# Altium PCB XDM3.3_PCB.PcbDoc
Units mm, origin at the board's own origin, x right, y up, seen from the top; angles counter-clockwise.
Board outline 151.26 x 111.81 mm, 2 copper layers (Top Layer, Bottom Layer); 89 components, 91 nets, 394 pads, 121 vias.
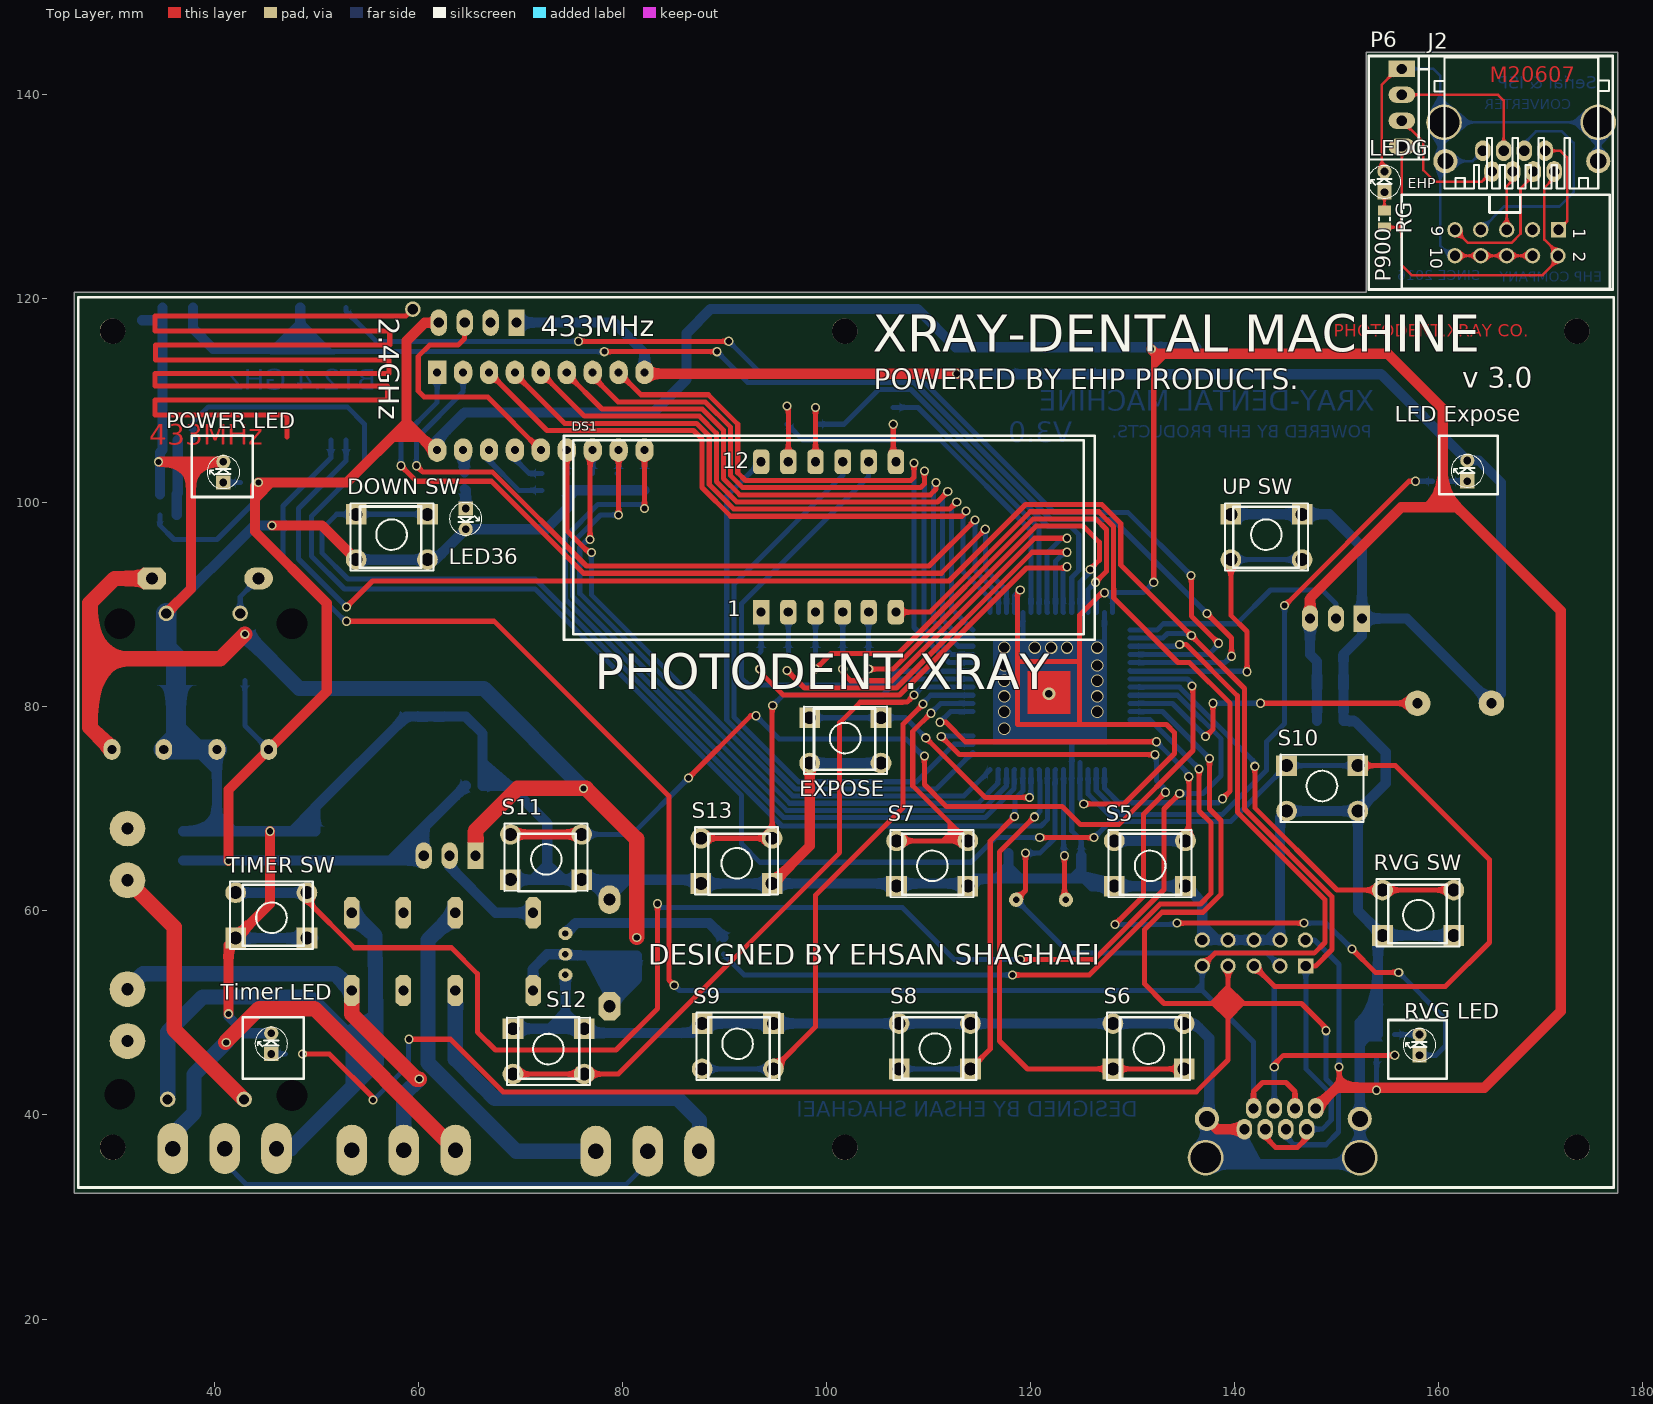
[diagram p0: Top Layer view]
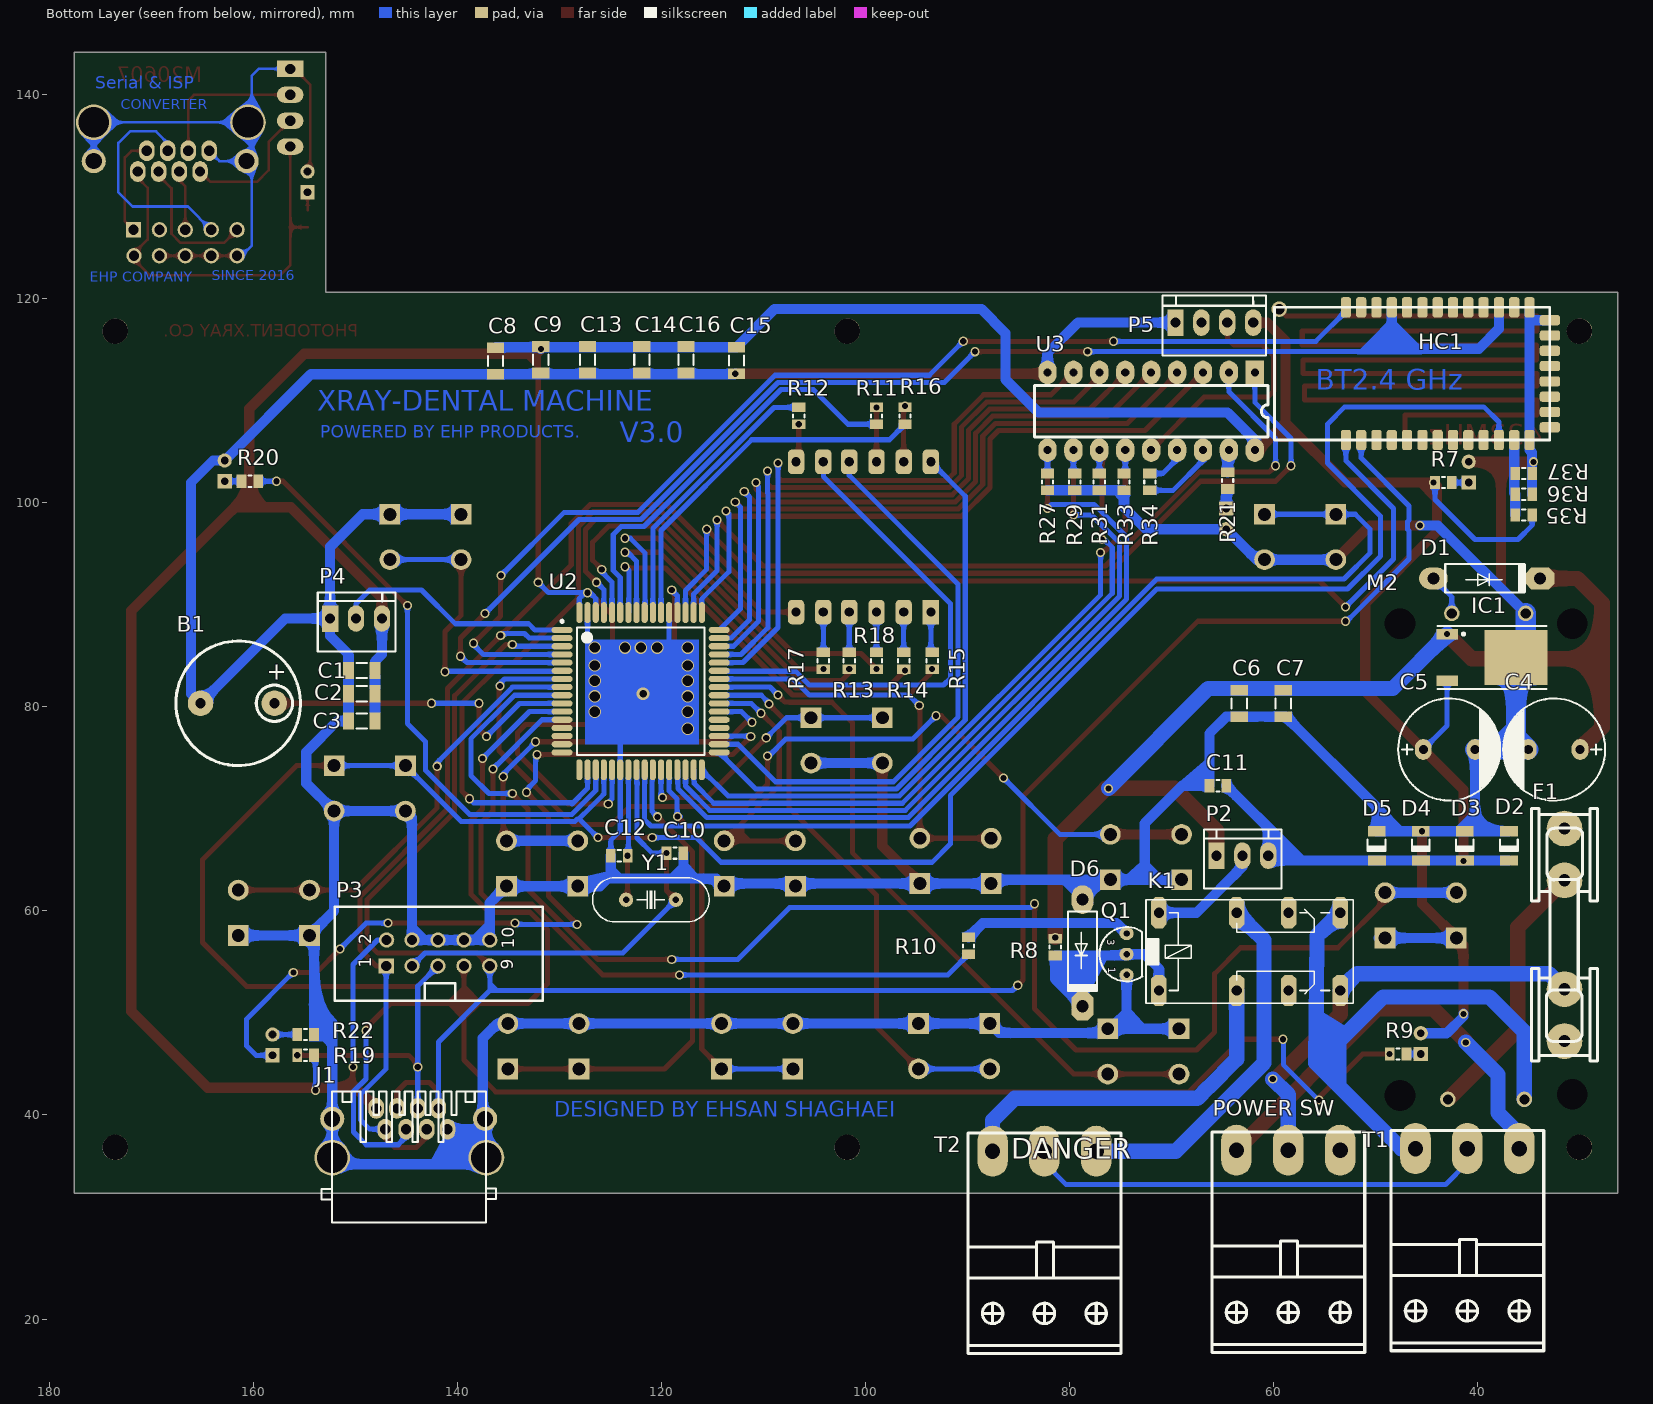
[diagram p1: Bottom Layer view, seen from below]

## Layer stack, top to bottom
Top Solder: solder mask 0.0102, Solder Resist, Dk 3.5
Top Layer: signal copper 0.0356
Dielectric1: dielectric 0.32, FR-4, Dk 4.8
Bottom Layer: signal copper 0.0356
Bottom Solder: solder mask 0.0102, Solder Resist, Dk 3.5

## Board outline
26.289,32.334 177.546,32.334 177.546,144.145 152.908,144.145 152.908,120.65 26.289,120.65

## Design rules (kind name [scope] priority, off if disabled: settings)
Clearance Clearance_2 [InPolygon] p1: gap=0.8
Clearance Clearance_1 [(OnLayer('Keep-Out Layer'))] p2: gap=0
Clearance [All] p3: gap=0.2
ComponentClearance [All] p1 off: gap=0.254 collisioncheckmode=3 verticalgap=0.254 showdistances=FALSE
FabricationTestpoint [(IsPad And (OnTopLayer Or OnBottomLayer))] p1: side=3 testpointundercomponent=TRUE minsize=1.016 maxsize=2.54 preferedsize=1.524 minholesize=0 maxholesize=1.016 preferedholesize=0.813 testpointgrid=0.025 allowsidetop=TRUE allowsidebottom=TRUE usegrid=TRUE gridtolerance=0
HoleSize [All] p1: absolutevalues=TRUE maxlimit=5 minlimit=0.025 maxpercent=80.000 minpercent=20.000
PolygonConnect [All] p1: connectstyle=Relief reliefconductorwidth=0.254 reliefentries=4 polygonreliefangle="90 Angle" airgapwidth=0.254
RoutingVias [All] p1: holewidth=0.6 width=0.9 viastyle="Through Hole" minholewidth=0.5 minwidth=0.7 maxholewidth=1.5 maxwidth=1.8
SolderMaskExpansion [All] p1: expansion=0.102
Width [All] p1: maxlimit=5 minlimit=0.1 preferedwidth=0.3
27 further rules are at their usual default settings.

## Components (designator, comment, footprint, x,y, rotation, side; value= is the part's Value field where it differs from the comment)
B1 "Buzzer" Buzzer 161.798,80.645 r180 bottom locked
C1 "10u" SMD_CAP_1206 148.082,83.566 r0 bottom locked
C2 "10u" SMD_CAP_1206 148.082,81.28 r0 bottom locked
C3 "100nF" SMD_CAP_1206 148.082,78.613 r0 bottom locked
C4 "1uF" "cap 04" 32.512,75.819 r180 bottom locked
C5 "1uF" "cap 04" 42.799,75.819 r0 bottom locked
C6 "10u" SMD_CAP_1206 63.373,81.636 r270 bottom locked
C7 "100nF" SMD_CAP_1206 59.055,81.636 r270 bottom locked
C8 "10u" SMD_CAP_1206 136.271,115.189 r270 bottom locked
C9 "100nF" SMD_CAP_1206 131.826,115.316 r270 bottom locked
C10 "18pF" SMD_CAP_0805 117.856,65.659 r0 bottom locked
C11 "100nF" SMD_CAP_0805 66.294,72.263 r180 bottom locked
C12 "18pF" SMD_CAP_0805 124.968,65.405 r180 bottom locked
C13 "10uF" SMD_CAP_1206 127.254,115.316 r270 bottom locked
C14 "10u" SMD_CAP_1206 121.92,115.316 r270 bottom locked
C15 "10u" SMD_CAP_1206 112.649,115.245 r270 bottom locked
C16 "100nF" SMD_CAP_1206 117.602,115.316 r270 bottom locked
D1 "1N4007" My_DO-41 33.665,92.837 r0 bottom locked
D2 "Diode Zener SMD" DIOMELF3615N 36.957,66.421 r90 bottom locked
D3 "Diode Zener SMD" DIOMELF3615N 41.275,66.421 r90 bottom locked
D4 "Diode Zener SMD" DIOMELF3615N 45.593,66.421 r90 bottom locked
D5 "Diode Zener SMD" DIOMELF3615N 49.911,66.421 r90 bottom locked
D6 "1N4007" My_DO-41 78.486,50.419 r90 bottom locked
"DOWN SW" "Switch PB" "Switch - Push to On" 57.404,96.647 r0 top locked
DS1 "7Segment-4Digit-CA" 7segCA 75.184,87.122 r0 top locked
EXPOSE "Switch PB" "Switch - Push to On" 101.854,76.708 r0 top locked
F1 "FUSE" FUSE_1 31.496,52.324 r90 bottom locked
HC1 "HC-05 Bluetooth" HC-05 42.926,112.649 r90 bottom locked
IC1 "L78M05" TO-252 39.624,84.836 r270 bottom locked
J1 "RJ45" My_RJ45 144.78,32.258 r180 bottom locked
J2 "RJ45" My_RJ45 168.148,140.843 r180 top locked
K1 "Relay-DPDT" My_REL_cochick 67.437,56.007 r180 bottom locked
LED36 "Red" LED-3mm 64.643,98.425 r270 top locked
"LED Expose" "Red" LED-3mm 162.814,103.124 r90 top locked
LEDG "Red" LED-3mm 154.686,131.445 r90 top locked
M2 "220-12 Medule" "AC-DC 220-12" 27.305,39.497 r90 bottom locked
P2 "LHWR" "Polarized Header 3" 63.119,65.532 r180 bottom locked
P3 "BoxHeader 2x5" "Box Header 2x5" 139.319,54.61 r90 bottom locked
P4 "LHWR" "Polarized Header 3" 149.987,88.773 r180 bottom locked
P5 "LHWR" "Polarized Header 4" 65.786,117.856 r180 bottom locked
P6 "LHWR" "Polarized Header 4" 156.591,138.684 r270 top locked
P900 "BoxHeader 2x5" "Box Header 2x5" 164.084,126.746 r270 top locked
"POWER LED" "Red" LED-3mm 40.894,102.997 r90 top locked
"POWER SW" "PHONIX3" PHONIX3 53.492,36.551 r0 bottom
Q1 "C945" C945 74.422,55.753 r270 bottom locked
R7 "330" "RES 0805 (2012X06L)" 44.196,101.981 r180 bottom locked
R8 "1K" "RES 0805 (2012X06L)" 81.407,55.626 r90 bottom locked
R9 "330" "RES 0805 (2012X06L)" 48.641,45.974 r180 bottom locked
R10 "330" "RES 0805 (2012X06L)" 89.916,55.753 r90 bottom locked
R11 "330" "RES 0805 (2012X06L)" 96.139,107.696 r90 bottom locked
R12 "330" "RES 0805 (2012X06L)" 106.553,109.346 r270 bottom locked
R13 "330" "RES 0805 (2012X06L)" 101.6,83.693 r90 bottom locked
R14 "330" "RES 0805 (2012X06L)" 96.266,83.693 r90 bottom locked
R15 "330" "RES 0805 (2012X06L)" 93.472,83.693 r90 bottom locked
R16 "330" "RES 0805 (2012X06L)" 98.933,107.696 r90 bottom locked
R17 "330" "RES 0805 (2012X06L)" 104.14,83.693 r90 bottom locked
R18 "330" "RES 0805 (2012X06L)" 98.933,83.693 r90 bottom locked
R19 "10K" "RES 0805 (2012X06L)" 154.052,45.847 r0 bottom locked
R20 "330" "RES 0805 (2012X06L)" 159.512,102.108 r0 bottom locked
R21 "330" "RES 0805 (2012X06L)" 64.516,102.997 r270 bottom locked
R22 "330" "RES 0805 (2012X06L)" 154.051,47.879 r0 bottom locked
R27 "1K" "RES 0805 (2012X06L)" 82.169,102.87 r270 bottom locked
R29 "1K" "RES 0805 (2012X06L)" 79.502,102.87 r270 bottom locked
R31 "1K" "RES 0805 (2012X06L)" 77.089,102.87 r270 bottom locked
R33 "1K" "RES 0805 (2012X06L)" 74.676,102.87 r270 bottom locked
R34 "820k" "RES 0805 (2012X06L)" 72.136,101.219 r90 bottom locked
R35 "51k" "RES 0805 (2012X06L)" 36.322,98.806 r180 bottom locked
R36 "100k" "RES 0805 (2012X06L)" 34.671,100.838 r0 bottom locked
R37 "100k" "RES 0805 (2012X06L)" 34.671,102.87 r0 bottom locked
RG "330" "RES 0805 (2012X06L)" 154.686,127 r90 top locked
"RVG LED" "Red" LED-3mm 158.115,46.863 r90 top locked
"RVG SW" "Switch PB" "Switch - Push to On" 157.988,59.817 r180 top locked
S5 "Switch PB" "Switch - Push to On" 131.699,64.643 r180 top locked
S6 "Switch PB" "Switch - Push to On" 131.572,46.736 r180 top locked
S7 "Switch PB" "Switch - Push to On" 110.363,64.643 r180 top locked
S8 "Switch PB" "Switch - Push to On" 110.617,46.736 r180 top locked
S9 "Switch PB" "Switch - Push to On" 91.313,46.736 r0 top locked
S10 "Switch PB" "Switch - Push to On" 148.59,72.009 r0 top locked
S11 "Switch PB" "Switch - Push to On" 72.517,65.278 r180 top locked
S12 "Switch PB" "Switch - Push to On" 72.771,46.228 r0 top locked
S13 "Switch PB" "Switch - Push to On" 91.186,64.897 r180 top locked
T1 "PHONIX3" PHONIX3 35.941,36.703 r0 bottom locked
T2 "PHONIX3" PHONIX3 77.394,36.449 r0 bottom
"Timer LED" "Red" LED-3mm 45.593,46.99 r90 top locked (schematic designator Timer)
"TIMER SW" "Switch PB" "Switch - Push to On" 45.593,59.563 r180 top locked
U2 "ATmega64A-AU" 64A_M 122.047,81.534 r180 bottom locked
U3 "PT2272" DIP18 61.849,112.776 r270 bottom locked
"UP SW" "Switch PB" "Switch - Push to On" 143.129,96.647 r0 top locked
Y1 "16MHz" "XTAL Small" 121.031,61.087 r0 bottom locked

## Footprints (in the part's own frame and the unit in brackets; to place one, negate y for a bottom-side part, rotate by r counter-clockwise, add the part's x,y. Pads: shape width x height; smd on the part's side, far side on the other; paste and mask are expansions set on the pad)
7segCA [mm] "7seg-CA; 12 Leads"
  rect 1.6x2.4 hole 0.9: 1(18.415,2.159)
  rrect50% 1.6x2.4 hole 0.9: 2(21.082,2.159) 3(23.749,2.159) 4(26.416,2.159) 5(28.956,2.159) 6(31.623,2.159) 7(31.623,16.891) 8(28.956,16.891) 9(26.416,16.891) 10(23.749,16.891) 11(21.082,16.891) 12(18.415,16.891)
  silkscreen extent 0,0 50.04,19
64A_M [mm] "Thin QFP, 64-Leads, Body 14x14mm, Pitch 0.8mm, IPC Low Density"
  oval 2.05x0.6 smd: 1(-7.7,6) 2(-7.7,5.2) 3(-7.7,4.4) 4(-7.7,3.6) 5(-7.7,2.8) 6(-7.7,2) 7(-7.7,1.2) 8(-7.7,0.4) 9(-7.7,-0.4) 10(-7.7,-1.2) 11(-7.7,-2) 12(-7.7,-2.8) 13(-7.7,-3.6) 14(-7.7,-4.4) 15(-7.7,-5.2) 16(-7.7,-6) 33(7.7,-6) 34(7.7,-5.2) 35(7.7,-4.4) 36(7.7,-3.6) 37(7.7,-2.8) 38(7.7,-2) 39(7.7,-1.2) 40(7.7,-0.4) 41(7.7,0.4) 42(7.7,1.2) 43(7.7,2) 44(7.7,2.8) 45(7.7,3.6) 46(7.7,4.4) 47(7.7,5.2) 48(7.7,6)
  oval 0.6x2.05 smd: 17(-6,-7.7) 18(-5.2,-7.7) 19(-4.4,-7.7) 20(-3.6,-7.7) 21(-2.8,-7.7) 22(-2,-7.7) 23(-1.2,-7.7) 24(-0.4,-7.7) 25(0.4,-7.7) 26(1.2,-7.7) 27(2,-7.7) 28(2.8,-7.7) 29(3.6,-7.7) 30(4.4,-7.7) 31(5.2,-7.7) 32(6,-7.7) 49(6,7.7) 50(5.2,7.7) 51(4.4,7.7) 52(3.6,7.7) 53(2.8,7.7) 54(2,7.7) 55(1.2,7.7) 56(0.4,7.7) 57(-0.4,7.7) 58(-1.2,7.7) 59(-2,7.7) 60(-2.8,7.7) 61(-3.6,7.7) 62(-4.4,7.7) 63(-5.2,7.7) 64(-6,7.7)
  silkscreen extent -7.83,-6.25 6.25,6.97, body extent -7,-7 7,7, height 1.2
"AC-DC 220-12" [mil]
  round 60 hole 39.37: 0(1955,600) 1(1955,315) 2(80,615) 3(80,320)
  round 60 hole 118.11: 4(1915,135) 5(1915,800) 6(95,800) 7(100,135)
  body extent 6,-5 2014,940, height 118
"Box Header 2x5" [mm]
  rect 1.5x1.5 hole 1: 1(-0.006,7.666)
  round 1.5 hole 1: 2(2.54,7.62) 3(-0.006,5.126) 4(2.534,5.126) 5(-0.006,2.586) 6(2.534,2.586) 7(-0.006,0.046) 8(2.534,0.046) 9(-0.006,-2.494) 10(2.534,-2.494)
  silkscreen extent -3.42,-7.7 5.8,12.7, body extent -3.4,-7.7 5.7,12.66, height 9.43
Buzzer [mm] "Magnetic Transducer"
  round 2.5 hole 1: 1(3.859,-0.297) 2(-3.38,-0.297)
  silkscreen extent -5.8,-6.4 6.4,5.8, body extent -5.67,-6.39 6.17,5.45, height 6.98
C945 [mil] "NPN Transistor"
  oval 50x55 hole 25: 1(80,0) 2(0,0) 3(-80,0)
  silkscreen extent -105,-105 105,61, body extent -94,-96 95,58, height 315
"cap 04" [mil]
  oval 65x80 hole 35: 1(100,0) 2(-100,0)
  silkscreen extent -197,-197 197,197, body extent -198,-197 198,199, height 513
DIOMELF3615N [mm] "MELF Diode, 2-Leads, Body 3.6x1.5mm, IPC Medium Density"
  rect 1x1.75 smd: 1(-1.495,-0.03) 2(1.38,-0.005)
  silkscreen extent -0.55,-0.88 0.55,0.88, body extent -1.61,-0.83 1.54,0.67, height 1.45
DIP18 [mm]
  rect 2.3x1.8 hole 0.8: 1(0,0)
  oval 2.3x1.8 hole 0.8: 2(0,-2.54) 3(0,-5.08) 4(0,-7.62) 5(0,-10.16) 6(0,-12.7) 7(0,-15.24) 8(0,-17.78) 9(0,-20.32) 10(7.62,-20.32) 11(7.62,-17.78) 12(7.62,-15.24) 13(7.62,-12.7) 14(7.62,-10.16) 15(7.62,-7.62) 16(7.62,-5.08) 17(7.62,-2.54) 18(7.62,0)
  silkscreen extent 1.27,-21.59 6.35,1.27
FUSE_1 [mm]
  round 3.5 hole 1.2: 1(0,0) 2(10.668,0) ""(-5.08,0) ""(15.748,0)
  silkscreen extent -7.04,-3.25 17.7,3.25
HC-05 [mm]
  rrect50% 2x1 smd: 1(-6.5,10) 2(-6.5,8.5) 3(-6.5,7) 4(-6.5,5.5) 5(-6.5,4) 6(-6.5,2.5) 7(-6.5,1) 8(-6.5,-0.5) 9(-6.5,-2) 10(-6.5,-3.5) 11(-6.5,-5) 12(-6.5,-6.5) 13(-6.5,-8) 22(6.5,-8) 23(6.5,-6.5) 24(6.5,-5) 25(6.5,-3.5) 26(6.5,-2) 27(6.5,-0.5) 28(6.5,1) 29(6.5,2.5) 30(6.5,4) 31(6.5,5.5) 32(6.5,7) 33(6.5,8.5) 34(6.5,10)
  rrect50% 1x2 smd: 14(-5.254,-10) 15(-3.754,-10) 16(-2.254,-10) 17(-0.754,-10) 18(0.746,-10) 19(2.246,-10) 20(3.746,-10) 21(5.246,-10)
  silkscreen extent -6.5,-10 6.5,17, body extent -6.5,-9.77 6.5,17.13, height 2.5
LED-3mm [mil]
  rect 55x55 hole 30: 1(-40,0)
  round 55 hole 30: 2(40,0)
  silkscreen extent -63,-63 63,63, body extent -69,-69 69,69, height 154
My_DO-41 [mil]
  oval 110x85 hole 47.24: A(420.71,10)
  oct 110x85 hole 47.24: K(8.9,10)
  silkscreen extent 64,-45 375,65
My_REL_cochick [mil]
  oct 60x120 hole 40: 1(-150,-150) 2(-150,150) O1(350,-150) O2(350,150) P1(150,-150) P2(150,150) S1(550,-150) S2(550,150)
  silkscreen extent -200,-200 600,200
My_RJ45 [mil]
  oval 60x80 hole 40: 1(150,250) 2(115,330) 3(70,250) 4(35,330) 5(-10,250) 6(-45,330) 7(-90,250) 8(-125,330)
  round 137.8 hole 118.11 unplated: shild(-295,140) shild(300,140)
  round 92.99 hole 62.01: shild(-295,290) shild(295,290)
  silkscreen extent -336,-110 336,395
PHONIX3 [mm]
  oval 3x5 hole 1.5: 1(0,0) 2(5.08,0) 3(10.16,0)
  silkscreen extent -2.41,-1.78 12.57,19.81
"Polarized Header 3" [mm]
  rect 1.6x2.6 hole 1: 1(-2.49,-0.12)
  oval 1.6x2.6 hole 1: 2(0.05,-0.12) 3(2.59,-0.12)
  silkscreen extent -3.7,-3.35 3.9,2.42, body extent -3.72,-3.35 3.9,2.45, height 10.75
"Polarized Header 4" [mm]
  rect 1.6x2.6 hole 1: 1(-3.84,-0.2)
  oval 1.6x2.6 hole 1: 2(-1.3,-0.2) 3(1.24,-0.2) 4(3.78,-0.2)
  silkscreen extent -5.1,-3.42 5.05,2.45, body extent -5.06,-3.43 5.1,2.37, height 10.75
"RES 0805 (2012X06L)" [mm] "Chip Resistor, 2-Leads, Body 2.0x1.3mm, IPC High Density _ (0.100 W)"
  rect 0.95x1.3 smd: 1(0,0) 2(1.65,0)
  silkscreen extent 0.67,-0.55 0.98,0.55, body extent -0.19,-0.63 1.84,0.64, height 0.6
SMD_CAP_0805 [mm]
  rect 0.95x1.3 smd: 1(0,0) 2(1.65,0)
  silkscreen extent 0.67,-0.55 0.98,0.55, body extent -0.19,-0.64 1.84,0.63, height 0.65
SMD_CAP_1206 [mm]
  rect 1.05x1.7 smd: 1(0,0) 2(2.596,0)
  silkscreen extent 0.8,-0.75 1.8,0.75, body extent -0.22,-0.77 2.82,0.75, height 0.75
"Switch - Push to On" [mil]
  rect 80x80 hole 50: 1(-137.5,87.5) 1(137.5,87.5)
  round 80 hole 50: 2(-137.5,-87.5) 2(137.5,-87.5)
  silkscreen extent -160,-130 160,130, body extent -155,-121 157,123, height 205
TO-252 [mm] "D-PAK/TO-252-AA; 3 Leads (1 Cropped); Body 10.1 (inc. leads) x 6.6 mm (LxW max)"
  rect 1x2.1 smd: 1(-2.285,-3.375) 3(2.285,-3.375)
  rect 5.4x6.2 smd: 4(0,3.375)
  silkscreen extent -3.08,-4.33 3.08,6.37, body extent -3.27,-4.11 3.27,5.83, height 2.39
"XTAL Small" [mil]
  round 55 hole 25: 1(-96.06,0) 2(96.06,0)
  silkscreen extent -225,-85 225,85, body extent -226,-89 226,89, height 140

## Part data
C1 C2 C3 C6 C7 C8 C9 C10 C11 C12 C13 C14 C15 C16: library part Cap-Bipolar, "Bipolar Capacitor"
C4 C5: library part Cap-Polar, "Polar Capacitor"
D1 D6: "1 Amp Diode"
"DOWN SW" EXPOSE "RVG SW" S5 S6 S7 S8 S9 S10 S11 S12 S13 "TIMER SW" "UP SW": "Push Button Switch"
DS1: library part 7Seg-4Digit-CA, "7-Segment Display: CA"
IC1: "Precision 500mA Regulator"
J1 J2: "Right Angle, Standard Profile, RJ45-Keyed, Flange Mount PCB Jack"
K1: "Dual-Pole Dual-Throw Relay"
LED36 "LED Expose" LEDG "POWER LED" "RVG LED" "Timer LED": library part LED, "LED"
P2 P4: library part "3pin LHWR"
P5 P6: library part "4pin LHWR"
Q1: "NPN Transistor"
R7 R8 R9 R10 R11 R12 R13 R14 R15 R16 R17 R18 R19 R20 R21 R22 R27 R29 R31 R33 R34 R35 R36 R37 RG: library part Resistor, "Resistor"
U2: "8-bit AVR Microcontroller, 64KB Flash, 2KB EEPROM, 4KB SRAM, 64-pin TQFP, Industrial Grade (-40°C to 85°C)"
Y1: library part XTAL, "XTAL Crystal"

## Free pads (board coordinates)
  round 2.5 hole 2.5: 1(30.032,36.818) 1(30.032,116.818) 1(101.782,36.818) 1(101.782,116.818) 1(173.532,36.818) 1(173.532,116.818)
  round 1.524 hole 1: ANTENNA(59.461,118.974)

## Via types
v1: diameter 0.9, hole 0.6, Top Layer to Bottom Layer, 106 vias
v2: diameter 1.2, hole 1, Top Layer to Bottom Layer, 14 vias
v3: diameter 1.27, hole 0.711, Top Layer to Bottom Layer, 1 vias

## Nets (pads, with @x,y where several pads share a name; then routed paths per layer and width w, separated by ;. In a path a pad name is that pad's centre, name@x,y a point inside that pad or via, vN(x,y) a via of type N, cw(c..) or ccw(c..) an arc to the next point about the centre after c; other vN are vias at no path point)
+12: C4.1 C6.1 C7.1 D1.K IC1.1 P2.1 R8.2 | length 114
  Top Layer w1.5: C4.1 27.813,77.978 27.813,84.709 ; D1.K 30.226,92.583 27.813,90.17 27.813,84.709 ; v1(42.999,87.121) 40.587,84.709 27.813,84.709 ; P2.1 65.609,67.895 69.723,72.009 v1(76.2,72.009) 76.454,72.009 81.407,67.056 v1(81.407,57.404)
  Bottom Layer w0.5: C7.1 C6.1
  Bottom Layer w1.5: v1(42.999,87.121) 48.332,81.788 66.421,81.788 v1(76.2,72.009)
A0: U2.51 U3.1 | length 83.1
  Top Layer w0.5: v1(58.293,103.632) 59.817,102.108 67.184,102.108 76.201,93.091 111.252,93.091 v1(115.57,97.409)
  Bottom Layer w0.5: v1(58.293,103.632) 58.293,106.299 61.849,109.855 U3.1 ; v1(115.57,97.409) 115.57,93.472 117.647,91.395 U2.51
A1: U2.50 U3.2 | length 81.7
  Top Layer w0.5: v1(59.817,103.632) 60.452,102.997 67.285,102.997 76.491,93.791 110.047,93.791 v1(114.554,98.298)
  Bottom Layer w0.5: v1(59.817,103.632) 59.817,106.299 64.389,110.871 U3.2 ; v1(114.554,98.298) 114.554,93.345 116.847,91.052 U2.50
A2: U2.49 U3.3 | length 66.8
  Top Layer w0.5: U3.3 72.619,107.086 86.97,107.086 87.813,106.243 87.813,101.493 90.627,98.679 113.303,98.679 113.665,99.041 v1(113.665,99.187)
  Bottom Layer w0.5: v1(113.665,99.187) 113.4,98.922 113.4,93.229 116.047,90.582 U2.49
A3: U2.48 U3.4 | length 65.6
  Top Layer w0.5: U3.4 69.469,112.649 74.332,107.786 87.26,107.786 88.513,106.533 88.513,101.783 90.917,99.379 112.079,99.379 v1(112.776,100.076)
  Bottom Layer w0.5: v1(112.776,100.076) 112.268,99.568 112.268,89.613 U2.48
A4: U2.47 U3.5 | length 64.8
  Top Layer w0.5: U3.5 76.299,108.486 87.549,108.486 89.213,106.823 89.213,102.073 91.207,100.079 110.874,100.079 v1(111.887,101.092)
  Bottom Layer w0.5: v1(111.887,101.092) 111.368,100.573 111.368,88.53 113.164,86.734 U2.47
A5: U2.46 U3.6 | length 63.5
  Top Layer w0.5: U3.6 74.549,112.649 78.012,109.186 87.839,109.186 89.913,107.113 89.913,102.363 91.497,100.779 110.177,100.779 110.744,101.346 v1(110.744,101.981)
  Bottom Layer w0.5: 110.49,100.33 110.479,100.341 ; v1(110.744,101.981) 110.744,101.865 110.479,101.6 110.479,100.341 ; U2.46 112.948,85.934 110.479,88.403 110.479,100.341
A6: U2.45 U3.7 | length 63.4
  Top Layer w0.5: U3.7 76.708,112.776 79.598,109.886 88.129,109.886 90.613,107.403 90.613,102.653 91.787,101.479 109.226,101.479 109.601,101.854 v1(109.601,103.124)
  Bottom Layer w0.5: v1(109.601,103.124) 109.601,100.968 109.579,100.946 109.579,87.753 112.198,85.134 U2.45
A7: U2.44 U3.8 | length 61
  Top Layer w0.5: U3.8 81.819,110.586 88.419,110.586 91.313,107.693 91.313,102.943 92.077,102.179 108.275,102.179 108.585,102.489 v1(108.585,103.886)
  Bottom Layer w0.5: v1(108.585,103.886) 108.574,103.875 108.574,87.768 112.008,84.334 U2.44
AS: HC1.24 HC1.31 U2.5 | length 132.2
  Top Layer w0.5: v1(78.232,114.808) v1(89.281,114.808) ; v1(137.287,89.154) 139.7,86.741 v1(139.7,84.963)
  Bottom Layer w0.5: 48.426,117.817 51.435,114.808 v1(78.232,114.808) ; v1(89.281,114.808) 92.292,111.797 108.574,111.797 122.008,98.363 128.078,98.363 v1(137.287,89.154) ; U2.5 139.071,84.334 v1(139.7,84.963)
  Bottom Layer w1: HC1.24 37.926,117.039 39.878,115.087 45.999,115.087 48.426,117.514 48.426,117.817 HC1.31
D0: R33.1 U2.32 U3.13 | length 66
  Top Layer w0.5: U3.13 74.549,97.282 76.708,95.123 v1(76.962,95.123)
  Bottom Layer w0.5: U3.13 74.549,102.997 R33.1 ; v1(76.962,95.123) 76.962,90.981 96.69,71.253 113.466,71.253 U2.32
D1: R31.1 U2.31 U3.12 | length 68.8
  Top Layer w0.5: v1(76.835,96.393) 76.835,104.648 76.708,104.775 U3.12
  Bottom Layer w0.5: v1(76.835,96.393) 76.581,96.393 75.819,95.631 75.819,91.134 96.4,70.553 114.876,70.553 116.797,72.474 116.797,73.834 U2.31 ; R31.1 U3.12
D2: R29.1 U2.30 U3.11 | length 73.4
  Top Layer w0.5: v1(79.629,98.806) U3.11
  Bottom Layer w0.5: R29.1 79.629,102.997 U3.11 ; v1(79.629,98.806) 77.851,98.806 75.119,96.074 75.119,90.844 96.11,69.853 115.269,69.853 117.647,72.231 U2.30
D3: R27.1 U2.29 U3.10 | length 79.2
  Top Layer w0.5: v1(82.169,99.441) U3.10
  Bottom Layer w0.5: v1(82.169,99.441) 81.788,99.822 77.597,99.822 74.419,96.644 74.419,90.554 95.82,69.153 115.559,69.153 118.397,71.991 118.397,73.784 U2.29 ; R27.1 U3.10
EARTH: T1.2 T2.2 | length 46
  Top Layer w1.5: T1.2@41.453,37.287 T1.2@41.707,37.287
  Bottom Layer w0.5: T1.2 41.021,35.306 43.155,33.172 80.34,33.172 82.474,35.306 T2.2
GND: "DOWN SW.2" "LED Expose.2" "POWER LED.2" "RVG SW.1" "Timer LED.2" "TIMER SW.1" "UP SW.1" B1.2 C1.2 C2.2 C3.2 C4.2 C5.2 C6.2 C7.2 C8.2 C9.2 C10.1 C11.1 C12.1 C13.2 C14.2 C15.2 C16.2 D2.2 D3.2 D4.2 D5.2 D6.A EXPOSE.2 HC1.13 HC1.21 HC1.22 IC1.4 J1.1 J1.shild LED36.2 M2.1 P3.4 P3.6 P3.8 P3.10 P4.1 P5.1 Q1.1 R22.1 R27.2 R29.2 R31.2 R33.2 R36.1 R37.1 S5.1 S6.2 S7.1 S8.2 S9.1 S10.2 S11.1 S12.1 S13.1 U2.22 U2.53 U2.63 U3.9 | length 720
  Top Layer w1: v1@34.671,104.013 37.719,104.013 ; M2.1 37.719,91.567 37.719,104.013 ; 40.894,104.013 37.719,104.013 ; v1(41.402,49.911) 41.402,56.642 42.1,57.34 45.466,60.706 v1(45.466,67.801) ; v1(45.669,97.765) 50.571,97.765 53.911,94.424 ; U3.9@82.296,112.649 v1(112.776,112.649) ; S13.1@94.678,62.674 98.361,66.358 EXPOSE.2@98.361,74.486 ; J1.shild@137.287,39.624 138.303,38.608 J1.1
  Bottom Layer w0.5: U2.53 119.247,85.35 124.047,80.55 ; C12.1 124.968,66.929 124.047,67.85 U2.22 124.047,80.55 ; U2.63 127.247,83.75 124.047,80.55
  Bottom Layer w1: HC1.21 34.926,117.895 ; R36.1 R37.1 34.671,104.902 34.926,105.157 HC1.13 34.926,117.895 ; HC1.22 34.926,117.895 ; M2.1 43.917,97.765 v1(45.669,97.765) ; D2.2 40.259,67.801 ; C5.2 40.259,67.801 ; v1(41.402,49.911) 41.402,49.657 43.053,48.006 45.593,48.006 ; 42.1,57.34 49.085,57.34 49.721,57.34 ; 53.911,94.424 60.896,94.424 61.658,94.424 LED36.2 72.517,97.409 74.676,99.568 R33.2 R31.2 R29.2 R27.2 ; S11.1@69.025,63.055 72.644,63.055 72.644,68.58 68.961,72.263 C11.1 66.294,77.394 64.648,79.04 C6.2 C7.2 58.796,79.04 49.906,70.15 D5.2 D4.2 v1(45.466,67.801) D3.2 40.259,67.801 ; S12.1@69.278,48.45 74.295,48.45 ; P5.1 79.194,117.656 82.169,114.681 U3.9 ; 72.707,63.055 76.01,63.055 S11.1@76.79,63.055 ; Q1.1 74.422,48.578 74.295,48.45 ; D6.A S11.1@76.79,63.055 ; EXPOSE.2@98.361,74.486 EXPOSE.2@105.346,74.486 ; v1(112.776,112.649) 112.832,112.593 C8.2 154.361,112.593 162.814,104.14 163.957,104.14 166.116,101.981 166.116,81.286 B1.2 156.873,88.653 P4.1 ; 117.856,63.5 C10.1 ; C12.1 124.968,63.5 ; J1.shild@137.16,39.497 137.16,35.814 137.16,35.179 152.273,35.179 152.273,35.814 152.273,39.624 152.273,49.047 154.051,50.825 ; J1.shild@137.287,39.624 J1.shild@137.516,39.395 ; 139.636,98.87 146.621,98.87 149.288,98.87 152.477,95.681 P4.1 ; J1.1 138.303,38.608 J1.shild@137.516,39.395 ; R22.1 154.051,50.825 ; 161.481,57.594 154.495,57.594 ; 74.295,48.45 76.263,48.45 76.683,48.031 86.893,48.031 87.82,48.959 94.805,48.959 107.124,48.959 114.109,48.959 128.079,48.959 135.064,48.959 136.081,48.959 137.516,47.523 J1.shild@137.516,39.395 ; S11.1@76.79,63.055 87.312,63.055 87.694,62.674 94.678,62.674 113.602,62.674 113.855,62.42 114.605,63.17 124.968,63.17 124.968,63.5 ; 124.968,63.5 126.047,62.42 128.207,62.42 135.191,62.42 136.825,60.787 P3.10 P3.8 P3.6 P3.4 144.445,69.134 145.097,69.787 S10.2@152.082,69.787 ; S10.2@152.082,69.787 154.813,72.517 154.813,75.565 151.765,78.613 C3.2 C2.2 C1.2 150.678,85.146 152.477,86.945 P4.1 ; S10.2@152.082,69.787 152.082,60.008 154.495,57.594 ; 154.051,50.825 154.051,57.15 154.495,57.594
  Bottom Layer w2: M2.1 35.306,85.779 IC1.4 36.249,77.016 C4.2 C5.2
  other v1: 34.544,104.013
  other v2: 117.424,77.851 117.424,79.527 126.543,79.527 117.424,81.026 126.543,81.026 117.424,82.55 126.543,82.55 117.424,84.049 126.543,84.049 117.424,85.801 120.421,85.801 122.022,85.801 123.571,85.801 126.543,85.801
  other v3: 121.793,81.28
KEY: HC1.34 U2.4 | length 110.9
  Top Layer w0.5: v1(75.692,115.824) v1(90.424,115.824) ; v1(135.738,92.862) 135.763,92.837 135.763,88.9 v1(138.43,86.233)
  Bottom Layer w0.5: HC1.34 52.926,118.778 55.88,115.824 v1(75.692,115.824) ; v1(90.424,115.824) 93.751,112.497 108.864,112.497 122.298,99.063 129.537,99.063 v1(135.738,92.862) ; U2.4 137.458,85.134 138.43,86.106 v1(138.43,86.233)
L: "POWER SW.2" F1.1 K1.S1 | length 42.5
  Top Layer w1.5: K1.S1 53.467,49.886 59.842,43.51 v1(60.096,43.51)
  Bottom Layer w1.5: F1.1 33.02,53.848 51.816,53.848 K1.S1 ; 58.572,36.551 58.572,41.986 v1(60.096,43.51)
MISO: HC1.2 J1.2 J1.6 P3.9 U2.3 | length 209.1
  Top Layer w0.5: v1(52.959,88.392) 67.437,88.392 84.582,71.247 84.582,53.213 v1(85.09,52.705) ; v1(134.62,86.106) 135.255,86.106 140.27,81.091 140.27,69.687 148.855,61.102 148.855,56.907 147.803,55.855 138.076,55.855 P3.9 ; J1.2 141.859,42.291 142.748,43.18 145.034,43.18 145.923,42.291 J1.6
  Bottom Layer w0.5: HC1.2 51.426,104.385 46.736,99.695 46.736,98.295 46.873,98.158 46.873,97.371 46.736,97.234 46.736,94.488 v1@52.832,88.392 ; v1(85.09,52.705) 85.598,52.197 136.825,52.197 141.859,47.163 J1.2 ; U2.3 134.448,85.934 v1(134.62,86.106) ; 136.825,52.405 P3.9
MOSI: HC1.1 J1.3 J1.7 P3.1 U2.2 | length 186.3
  Top Layer w0.5: v1(52.959,89.789) 55.499,92.329 112.014,92.329 119.507,99.822 126.98,99.822 128.846,97.956 128.846,93.912 v1(135.763,86.995) 140.97,81.788 140.97,69.984 149.555,61.398 149.555,56.21 147.949,54.604 P3.1 ; J1.3 143.002,37.846 144.018,36.83 146.177,36.83 147.066,37.719 J1.7
  Bottom Layer w0.5: HC1.1 52.926,104.107 48.26,99.441 48.26,94.488 v1(52.959,89.789) ; U2.2 132.962,86.734 133.426,87.198 135.56,87.198 v1(135.763,86.995) ; P3.1 146.985,44.531 149.479,42.037 149.479,39.497 148.59,38.608 J1.7
N: K1.S2 M2.3 T1.3 | length 60
  Bottom Layer w1.5: M2.3 35.433,48.133 38.862,51.562 49.276,51.562 55.753,45.085 55.877,45.212 55.753,57.577 K1.S2 ; T1.3 47.498,36.703 55.88,45.085
NetB1_1: B1.1 U2.10 | length 32.4
  Top Layer w0.5: v1(137.16,77.089) 137.879,77.808 v1(137.879,80.348) ; v1(142.537,80.348) B1.1
  Bottom Layer w0.5: U2.10 133.915,80.334 v1(137.16,77.089) ; v1(137.879,80.348) v1(142.537,80.348)
NetC12_2: C12.2 U2.23 Y1.2 | length 12.8
  Top Layer w0.5: v1(123.318,65.405) 123.318,61.24 Y1.2
  Bottom Layer w0.5: U2.23 123.247,65.476 v1(123.318,65.405)
NetD1_A: D1.A M2.0 | length 4.2
  Bottom Layer w0.5: M2.0 42.545,90.777 D1.A
NetD6_K: D6.K K1.1 Q1.2 R8.1 | length 19
  Bottom Layer w1: K1.1 71.247,54.356 72.644,55.753 Q1.2 74.549,55.626 R8.1 81.407,53.312 D6.K
"NetDOWN SW_1": "DOWN SW.1" U2.25 | length 100.6
  Bottom Layer w0.5: 60.896,98.87 53.911,98.87 52.006,98.87 50.546,97.409 50.546,95.097 53.122,92.521 71.462,92.521 95.657,68.326 106.258,68.326 106.263,68.331 107.478,68.331 107.483,68.326 113.243,68.326 113.248,68.331 114.463,68.331 114.474,68.321 115.573,68.321 115.578,68.315 116.324,68.315 116.329,68.321 121.026,68.321 121.647,68.942 U2.25
NetDS1_1: DS1.1 R15.2 | length 4
  Bottom Layer w0.5: R15.2 93.599,85.47 DS1.1
NetDS1_2: DS1.2 R14.2 | length 3.9
  Bottom Layer w0.5: R14.2 DS1.2
NetDS1_3: DS1.3 R18.2 | length 3.9
  Bottom Layer w0.5: R18.2 DS1.3
NetDS1_4: DS1.4 R13.2 | length 3.9
  Bottom Layer w0.5: R13.2 DS1.4
NetDS1_5: DS1.5 R17.2 | length 3.9
  Bottom Layer w0.5: R17.2 DS1.5
NetDS1_6: DS1.6 U2.18 | length 72.6
  Top Layer w0.5: DS1.6 110.135,89.281 119.976,99.122 126.69,99.122 128.146,97.666 128.146,91.567 128.154,91.559 128.154,90.667 134.468,84.353 135.56,84.353 139.57,80.343 139.57,71.752 v1(138.811,70.993)
  Bottom Layer w0.5: U2.18 127.247,72.016 128.778,70.485 128.894,70.601 138.419,70.601 v1(138.811,70.993)
NetDS1_7: DS1.7 R12.2 | length 3.8
  Top Layer w0.5: v1(106.553,107.696) 106.553,104.267 DS1.7
NetDS1_8: DS1.8 U2.43 | length 49.9
  Bottom Layer w0.5: DS1.8 104.14,102.565 91.694,90.119 91.694,82.804 92.354,82.144 105.512,82.144 106.852,83.484 114.297,83.484 U2.43
NetDS1_9: DS1.9 U2.34 | length 57
  Bottom Layer w0.5: DS1.9 101.6,102.692 90.932,92.024 90.932,78.991 97.27,72.653 108.823,72.653 112.504,76.334 U2.34
NetDS1_10: DS1.10 R16.2 | length 5.3
  Top Layer w0.5: DS1.10 v1(98.933,109.346)
NetDS1_11: DS1.11 R11.2 | length 5.5
  Top Layer w0.5: v1(96.139,109.474) 96.266,109.347 DS1.11
NetDS1_12: DS1.12 U2.33 | length 55.1
  Bottom Layer w0.5: DS1.12 90.232,100.646 90.232,78.701 96.98,71.953 110.766,71.953 U2.33
NetEXPOSE_1: EXPOSE.1 U2.27 | length 27.6
  Top Layer w0.5: v1(109.728,76.962) 115.57,71.12 v1(119.888,71.12)
  Bottom Layer w0.5: EXPOSE.1@98.361,78.93 105.346,78.93 107.759,78.93 v1(109.728,76.962) ; v1(119.888,71.12) 119.888,71.184 120.015,71.311 120.047,71.279 U2.27
NetF1_2: F1.2 M2.2 | length 26.2
  Top Layer w1.5: F1.2 36.068,58.42 36.068,48.387 M2.2
NetHC1_12: HC1.12 R35.1 R36.2 R37.2 | length 7.4
  Bottom Layer w1: R35.1 R35.1 R36.2 36.426,100.943 HC1.12
NetJ2_1: J2.1 J2.shild LEDG.2 P6.1 P900.4 P900.6 P900.8 P900.10 | length 70.3
  Top Layer w0.254: LEDG.2 154.432,132.715 154.432,140.97 155.986,142.524 P6.1 ; J2.shild@160.147,132.969 J2.shild@160.655,133.477 ; P900.10@161.157,124.212 P900.10 P900.8 P900.6 P900.4
  Bottom Layer w0.254: P6.1 159.482,142.524 160.147,141.859 ; J2.shild@160.147,132.969 160.147,125.222 P900.10@161.157,124.212 ; J2.1 163.322,133.477 160.655,133.477 160.147,133.985 J2.shild@160.147,136.906 ; J2.shild@175.641,133.477 175.641,137.287 160.528,137.287 J2.shild@160.147,136.906 ; J2.shild@160.147,136.906 160.147,141.859 ; J2.shild@160.147,136.906 160.147,141.859
NetJ2_2: J2.2 P6.3 | length 13.4
  Top Layer w0.254: P6.3 158.496,135.339 158.496,132.588 159.639,131.445 164.211,131.445 J2.2
NetJ2_3: J2.3 P6.2 | length 15.2
  Top Layer w0.254: P6.2 165.832,139.984 166.37,139.446 J2.3
NetJ2_4: J2.4 P900.5 | length 6
  Top Layer w0.254: P900.5 166.67,130.983 167.259,131.572 J2.4
NetJ2_5: J2.5 P900.7 | length 22
  Bottom Layer w0.254: P900.7 166.41,129.032 171.831,129.032 173.228,130.429 173.228,135.255 172.085,136.398 169.545,136.398 168.402,135.255 J2.5
NetJ2_6: J2.6 P900.9 | length 13.9
  Top Layer w0.254: P900.9 162.866,125.476 167.132,125.476 168.021,126.365 168.021,130.81 169.291,132.08 J2.6
NetJ2_7: J2.7 P900.1 | length 9.9
  Top Layer w0.254: J2.7 171.958,134.493 172.593,133.858 172.593,127.595 P900.1
NetJ2_8: J2.8 P6.4 P900.2 RG.1 | length 39.5
  Top Layer w0.254: RG.1 156.391,127 ; P6.4 156.391,127 ; J2.8@171.577,132.461 J2.8 171.323,131.826 170.37,130.874 170.37,125.793 171.704,124.46 P900.2 171.704,123.825 170.18,122.301 157.353,122.301 156.391,123.263 156.391,127
NetK1_2: K1.2 P2.2 | length 11.1
  Bottom Layer w1: P2.2 63.069,64.312 67.564,59.817 K1.2
NetK1_P1: K1.P1 T2.3 | length 36.2
  Bottom Layer w1.5: K1.P1 63.627,45.466 66.396,42.697 66.396,42.723 67.488,41.631 85.395,41.631 87.554,39.472 T2.3
NetK1_P2: K1.P2 T2.1 | length 35.8
  Bottom Layer w1.5: K1.P2 60.96,57.15 60.96,45.085 69.596,36.449 T2.1
NetLED36_1: LED36.1 R21.2 | length 2
  Bottom Layer w1: R21.2 64.643,101.22 LED36.1
"NetLED Expose_1": "LED Expose.1" R20.2 | length 1.7
  Bottom Layer w0.5: R20.2 162.814,102.108
NetLEDG_1: LEDG.1 RG.2 | length 1.8
  Top Layer w0.254: RG.2 LEDG.1
NetP5_3: P5.3 U3.14 | length 24.6
  Top Layer w0.5: P5.3 64.546,116.108 63.881,115.443 61.087,115.443 59.995,114.351 59.995,110.947 60.579,110.363 66.802,110.363 U3.14
"NetPOWER LED_1": "POWER LED.1" R7.2 | length 1.7
  Bottom Layer w0.5: 40.894,101.981 R7.2
"NetPOWER SW_3": "POWER SW.3" T1.1 | length 42.2
  Top Layer w1.5: v1@41.11,47.13 44.399,50.419 49.808,50.419 63.652,36.575 63.652,36.551
  Bottom Layer w1.5: T1.1 35.941,38.125 38.024,40.208 38.024,43.967 v1(41.173,47.117)
NetQ1_3: Q1.3 R10.2 | length 16.5
  Bottom Layer w1: Q1.3 75.438,58.801 88.518,58.801 R10.2
NetR9_2: "Timer LED.1" R9.2 | length 1.4
  Bottom Layer w0.5: 45.593,45.974 R9.2
NetR10_1: R10.1 U2.12 | length 73.4
  Top Layer w0.5: v1(118.237,53.721) 125.755,53.721 132.715,60.681 136.653,60.681 137.693,61.721 137.693,68.631 136.525,69.799 v1(136.525,73.914)
  Bottom Layer w0.5: R10.1 91.948,53.721 v1(118.237,53.721) ; U2.12 131.705,78.734 v1(136.525,73.914)
NetR11_1: R11.1 U2.54 | length 36.3
  Bottom Layer w0.5: R11.1 97.663,106.172 111.151,106.172 120.047,97.276 U2.54
NetR12_1: R12.1 U2.55 | length 27.4
  Bottom Layer w0.5: R12.1 108.967,109.346 120.847,97.466 U2.55
NetR13_1: R13.1 U2.56 | length 35.9
  Top Layer w0.5: v1(101.6,83.693) 101.6,83.312 102.359,82.553 106.429,82.553 120.396,96.52 123.063,96.52
  Bottom Layer w0.5: U2.56 121.603,89.278 121.603,95.06 123.063,96.52
  other v1: 123.568,96.52
NetR14_1: R14.1 U2.57 | length 39.7
  Top Layer w0.5: v1(96.139,83.566) 97.852,81.853 106.872,81.853 120.168,95.149 v1@123.317,95.149
  Bottom Layer w0.5: U2.57 122.447,94.279 v1@123.317,95.149
  other v1: 123.568,95.149
NetR15_1: R15.1 U2.58 | length 41.2
  Top Layer w0.5: v1(93.472,83.693) 93.472,83.439 95.758,81.153 107.162,81.153 119.608,93.599 123.441,93.599 v1(123.568,93.726)
  Bottom Layer w0.5: U2.58 123.197,89.284 123.197,93.355 v1(123.568,93.726)
NetR16_1: R16.1 U2.59 | length 41
  Bottom Layer w0.5: R16.1 101.727,107.696 105.128,111.097 108.285,111.097 121.718,97.663 123.952,97.663 124.725,96.89 124.725,93.356 124.047,92.678 U2.59
NetR17_1: R17.1 U2.60 | length 36.8
  Top Layer w0.5: v1(104.14,83.693) 106.527,83.693 120.556,97.722 125.163,97.722 126.746,96.139 126.746,94.361 v1(125.857,93.472)
  Bottom Layer w0.5: U2.60 124.847,92.208 125.857,93.218 v1(125.857,93.472)
NetR18_1: R18.1 U2.61 | length 43.9
  Top Layer w0.5: v1(98.933,83.693) 100.457,85.217 107.061,85.217 120.266,98.422 126.4,98.422 127.446,97.376 127.446,93.283 v1(126.365,92.202)
  Bottom Layer w0.5: U2.61 125.647,91.484 v1(126.365,92.202)
NetR20_1: R20.1 U2.19 | length 57.9
  Top Layer w0.5: v1(144.907,89.916) 157.099,102.108 v1(157.734,102.108)
  Bottom Layer w0.5: U2.19 126.447,71.8 128.789,69.458 138.8,69.458 143.129,73.787 143.129,76.581 144.907,78.359 v1(144.907,89.916) ; v1(157.734,102.108) R20.1@159.385,102.108
NetR21_1: R21.1 U3.17 | length 2.2
  Bottom Layer w1: U3.17 64.516,105.029 R21.1
NetR22_2: "RVG LED.2" R22.2 | length 2.4
  Bottom Layer w0.5: R22.2 158.115,47.879
NetR34_1: R34.1 U3.16 | length 7.4
  Bottom Layer w0.5: U3.16 66.929,104.14 69.85,101.219 R34.1
NetR34_2: R34.2 U3.15 | length 4.1
  Bottom Layer w0.5: U3.15 69.469,104.267 70.867,102.869 R34.2
"NetRVG LED_1": "RVG LED.1" U2.35 | length 85.8
  Top Layer w0.5: v1(111.252,77.089) 113.03,75.311 v1(132.207,75.311) ; v1(128.27,58.674) 131.064,61.468 131.064,69.469 v1(133.223,71.628) ; v1(134.366,58.801) v1(146.812,58.801) ; v1(151.511,56.261) 153.797,53.975 v1(156.083,53.975)
  Bottom Layer w0.5: v1(111.252,77.089) 111.297,77.134 U2.35 ; v1(128.27,58.674) 134.239,58.674 v1(134.366,58.801) ; v1(132.207,75.311) 132.334,75.184 132.334,72.771 133.223,71.882 v1(133.223,71.628) ; v1(146.812,58.801) 148.971,58.801 v1(151.511,56.261) ; v1(156.083,53.975) 160.655,49.403 160.655,46.761 159.741,45.847 158.115,45.847
"NetRVG SW_2": "RVG SW.2" U2.8 | length 42.6
  Top Layer w0.5: v1(141.986,74.168) 141.986,70.104 150.05,62.039 154.495,62.039 161.481,62.039
  Bottom Layer w0.5: U2.8 134.601,81.934 134.736,81.799 134.736,81.796 135.263,81.269 135.266,81.269 139.384,77.151 139.384,77.148 141.986,74.546 v1(141.986,74.168)
NetS5_2: S5.2 U2.38 | length 44
  Top Layer w0.5: v1(111.125,78.486) 111.709,78.486 113.614,76.581 v1(132.334,76.581) ; S5.2@135.191,66.865 135.763,67.437 135.509,67.691 135.509,71.117 135.52,71.128 135.52,73.141 v1(135.509,73.152)
  Bottom Layer w0.5: v1(111.125,78.486) 112.173,79.534 U2.38 ; v1(132.334,76.581) 135.509,73.406 v1(135.509,73.152)
  Bottom Layer w1: S5.2@128.207,66.865 S5.2@135.191,66.865
NetS6_1: S6.1 U2.26 | length 47.5
  Top Layer w0.5: v1(120.396,69.221) 116.967,65.792 116.967,47.244 119.697,44.514 128.079,44.514 S6.1@135.064,44.514
  Bottom Layer w0.5: v1(120.396,69.221) 120.915,69.74 120.915,72.78 120.897,72.798 120.897,73.784 U2.26
NetS7_2: S7.2 U2.39 | length 27
  Top Layer w0.5: S7.2@106.87,66.865 113.855,66.865 108.458,72.263 108.458,77.597 v1(110.236,79.375)
  Bottom Layer w0.5: v1(110.236,79.375) 111.195,80.334 U2.39
NetS8_1: S8.1 U2.28 | length 38.8
  Top Layer w0.5: S8.1@114.109,44.514 116.053,46.457 116.053,66.853 v1(118.44,69.24)
  Bottom Layer w0.5: S8.1@107.124,44.514 S8.1@114.109,44.514 ; v1(118.44,69.24) 118.164,69.24 118.466,69.542 118.466,70.97 119.247,71.752 U2.28
NetS9_2: S9.2 U2.40 | length 53.8
  Top Layer w0.5: S9.2@94.805,44.514 98.933,48.641 98.933,61.544 107.518,70.129 107.518,78.308 v1@109.283,80.073
  Bottom Layer w0.5: S9.2@87.82,44.514 S9.2@94.805,44.514 ; v1(109.474,80.264) 109.474,80.391 110.217,81.134 U2.40
NetS11_2: S11.2 U2.7 | length 93.9
  Top Layer w0.5: v1(86.487,73.025) 92.583,79.121 v1(93.091,79.121) ; v1(109.601,75.184) 109.601,72.39 111.749,70.242 119.493,70.242 119.515,70.22 120.261,70.22 120.283,70.242 123.103,70.242 124.892,68.453 128.651,68.453 135.915,75.717 135.915,81.966 v1(135.839,82.042)
  Top Layer w1: S11.2@69.025,67.501 S11.2@76.01,67.501
  Bottom Layer w0.5: S11.2@76.01,67.501 80.962,67.501 v1(86.487,73.025) ; v1(93.091,79.121) 95.377,76.835 107.823,76.835 109.474,75.184 v1(109.601,75.184) ; U2.7 135.401,82.734 136.042,82.093 135.992,82.042 v1(135.839,82.042)
NetS12_2: S12.2 U2.41 | length 68.2
  Top Layer w0.5: S12.2@69.278,44.005 76.263,44.005 79.592,44.005 101.295,65.709 101.295,78.435 103.313,80.453 107.452,80.453 107.454,80.455 107.887,80.455 v1(108.585,81.153)
  Bottom Layer w0.5: v1(108.585,81.153) 109.366,81.934 U2.41
NetS13_2: S13.2 U2.42 | length 40.7
  Top Layer w0.5: S13.2@87.694,67.12 94.678,67.12 94.678,80.073 v1(94.742,80.137)
  Bottom Layer w0.5: v1(94.742,80.137) 95.758,81.153 105.511,81.153 107.092,82.734 U2.42
"NetTIMER SW_2": "TIMER SW.2" U2.9 | length 147.4
  Top Layer w0.5: 49.085,61.785 49.085,61.023 53.721,56.388 63.246,56.388 65.786,53.848 65.786,48.133 67.564,46.355 79.375,46.355 83.439,50.419 v1(83.439,60.706) ; v1(118.999,55.245) 126.238,55.245 133.096,62.103 133.096,69.977 v1(134.62,71.501)
  Bottom Layer w0.5: v1(83.439,60.706) 83.82,60.325 107.442,60.325 112.522,55.245 v1(118.999,55.245) ; U2.9 134.408,81.134 134.973,80.569 134.976,80.569 138.684,76.861 138.684,73.279 136.906,71.501 v1(134.62,71.501)
  Bottom Layer w1: 42.1,61.785 49.085,61.785
NetU2_6: "UP SW.2" U2.6 | length 30.1
  Top Layer w0.5: 139.636,94.424 139.636,88.963 141.224,87.376 v1(141.224,83.439)
  Bottom Layer w0.5: U2.6 129.797,83.484 141.179,83.484 v1(141.224,83.439) ; 139.636,94.424 146.621,94.424
PEN: P4.2 U2.1 | length 23.8
  Bottom Layer w0.5: U2.1 132.416,87.534 133.02,88.138 140.208,88.138 143.51,91.44 148.59,91.44 149.937,90.093 P4.2
RST: HC1.11 J1.4 P3.5 R19.2 S10.1 U2.20 | length 240.6
  Top Layer w0.5: v1(120.904,67.183) 126.111,67.183 126.238,67.31 v1(126.238,67.183) ; P3.5 143.931,52.578 160.655,52.578 164.973,56.896 164.973,65.024 155.766,74.231 S10.1@152.082,74.231 ; v1(143.891,44.704) 143.891,44.958 144.78,45.847 v1(155.702,45.847)
  Bottom Layer w0.5: HC1.11 37.926,107.903 39.421,109.398 53.035,109.398 54.737,107.696 54.737,103.886 49.53,98.679 49.53,94.767 52.756,91.542 71.452,91.542 91.694,71.299 91.694,66.548 93.472,64.77 114.173,64.77 116.586,67.183 v1(120.904,67.183) ; U2.20 125.647,71.457 125.719,71.385 126.936,70.168 128.079,69.025 ; v1(126.238,67.183) 128.079,69.025 ; P3.5 143.891,52.618 v1(143.891,44.704) J1.4 ; S10.1@152.082,74.231 145.097,74.231 139.624,68.758 128.499,68.758 128.233,69.025 128.079,69.025
SCK: J1.5 P3.7 R9.1 U2.11 | length 184.2
  Top Layer w0.5: v1(48.641,45.974) 51.283,45.974 55.753,41.504 55.702,41.453 v1(55.575,41.453) ; v1(59.08,47.422) 63.144,47.422 68.301,42.266 136.246,42.266 139.365,45.385 139.365,50.927 ; v1(137.541,74.93) 137.541,69.977 138.659,68.859 138.659,61.62 136.906,59.868 132.893,59.868 131.191,58.166 131.191,52.832 133.096,50.927 139.365,50.927 ; P3.7 139.365,50.927 ; v1(148.971,48.26) 148.971,48.514 146.558,50.927 139.365,50.927
  Bottom Layer w0.5: v1(55.575,41.453) 59.055,44.933 59.055,47.396 v1(59.08,47.422) ; U2.11 132.937,79.534 v1(137.541,74.93) ; J1.5 145.034,37.846 145.796,37.084 148.945,37.084 150.179,38.318 150.179,42.327 148.971,43.535 v1(148.971,48.26)
VCC: C1.1 C2.1 C3.1 C5.1 C8.1 C9.1 C11.2 C13.1 C14.1 C15.1 C16.1 D2.1 D3.1 D4.1 D5.1 IC1.3 J1.8 P2.3 P3.2 P4.3 P5.4 R7.1 R19.1 R35.2 U2.21 U2.52 U2.62 U2.64 U3.18 | length 487.6
  Top Layer w0.5: v1(118.999,91.44) 118.72,91.161 118.72,78.257 133.325,78.257 134.112,77.47 134.112,75.438 129.159,70.485 v1(125.222,70.485) ; 124.816,78.334 124.816,89.002 127,91.186 v1(127.254,91.186) ; v1(131.826,115.062) 132.08,114.808 v1(132.08,92.202) ; J1.8 148.209,40.64 150.241,42.672 v1(150.241,44.704) ; v1(153.924,42.418) v1@153.924,42.672
  Top Layer w1: v1(41.402,64.897) 41.402,71.882 C5.1 51.029,81.509 51.029,90.145 43.993,97.18 43.993,101.651 v1(44.323,101.981) 52.984,101.981 58.852,107.848 61.544,105.156 U3.18 ; 58.852,107.95 58.852,115.875 60.633,117.656 P5.4 ; v1(131.826,115.062) 132.283,114.605 155.016,114.605 160.401,109.22 160.401,100.965 ; P4.3 147.397,90.628 156.337,99.568 159.004,99.568 160.401,100.965 ; J1.8 149.987,42.672 150.241,42.672 153.924,42.672 164.465,42.672 171.958,50.165 171.958,89.408 160.401,100.965
  Bottom Layer w0.5: R35.2 34.672,97.789 36.068,96.393 40.259,96.393 44.196,100.33 R7.1 ; IC1.3 42.999,78.159 C5.1 ; U2.52 118.447,90.888 v1(118.999,91.44) ; U2.21@124.841,74.549 124.841,70.993 125.222,70.612 v1(125.222,70.485) ; U2.62 126.447,90.633 127,91.186 v1(127.254,91.186) v1@127.508,91.186 ; U2.64 128.047,90.647 v1@127.508,91.186 ; v1(132.08,92.202) 131.064,91.186 v1@127.508,91.186 ; P3.2 147.828,57.15 150.241,54.737 v1(150.241,44.704) ; v1(153.924,42.418) 153.924,45.719 R19.1
  Bottom Layer w1: D2.1 D3.1 ; D3.1@41.402,64.926 D4.1 D5.1 60.043,64.926 P2.3 60.529,68.148 C11.2 ; U3.18 61.849,106.172 64.516,108.839 83.033,108.839 86.296,112.103 86.296,116.624 88.671,118.999 108.895,118.999 C15.1 C9.1@131.826,115.245 ; v1(131.826,115.062) C9.1@131.826,115.245 ; C9.1 C9.1@131.826,115.245 ; C8.1 136.215,115.245 C9.1@131.826,115.245 ; P4.3 147.397,85.14 148.082,84.455 C1.1 C2.1 C3.1
XTAL: C10.2 P3.3 U2.24 Y1.1 | length 43.7
  Top Layer w0.5: Y1.1 119.506,62.002 v1(119.506,65.659)
  Bottom Layer w0.5: Y1.1 123.798,55.88 143.169,55.88 P3.3 ; v1(119.506,65.659) 120.904,65.659 122.397,67.152 122.397,73.784 U2.24
pads on no net: "POWER SW.1" F1. HC1.3 HC1.4 HC1.5 HC1.6 HC1.7 HC1.8 HC1.9 HC1.10 HC1.14 HC1.15 HC1.16 HC1.17 HC1.18 HC1.19 HC1.20 HC1.23 HC1.25 HC1.26 HC1.27 HC1.28 HC1.29 HC1.30 HC1.32 HC1.33 K1.O1 K1.O2 M2.4 M2.5 M2.6 M2.7 P5.2 P900.3 U2.13 U2.14 U2.15 U2.16 U2.17 U2.36 U2.37
copper on no net: | length 187.7
  Top Layer w0.5: 47.142,106.451 47.142,108.585 34.214,108.585 34.214,110.084 56.998,110.084 56.998,111.43 34.188,111.43 34.188,112.674 57.125,112.674 57.125,113.995 34.227,113.995 34.227,115.468 57.125,115.468 ; 57.201,115.468 57.201,116.815 34.188,116.815 34.188,118.288 36.474,118.288 58.776,118.288 59.461,118.974

## Other copper
Top Layer:
  rectangle net GND: 119.71,79.299 123.901,83.49
  region net SCK: 139.379,49.173 141.166,51.013 139.294,52.832 137.506,50.992
  rectangle net VCC: 118.872,84.201 124.892,84.684
  region net +12: 28.219,86.919 30.226,84.912 30.226,84.582 28.245,82.601
  region net VCC: 46.177,101.956 44.247,100.025 44.247,101.905 44.323,101.981
  region net VCC: 58.877,108.026 58.09,107.239 58.09,107.213 59.563,107.213 59.614,107.264
  region net VCC: 150.241,43.815 151.028,43.028 151.028,42.647 149.708,42.647 149.53,42.824
  region net VCC: 160.401,100.965 158.496,99.06 162.281,99.06 162.357,98.984
  region net VCC: 131.826,115.062 134.137,115.062 132.08,113.005
  region net NetS7_2: 113.855,66.865 111.912,68.809 111.912,67.678 111.1,66.865
  region net VCC: 59.004,108.509 57.328,106.832 57.328,105.969 60.401,105.969 60.452,106.02
  text "M20607" at 164.998,141.199 h1.5
  text "PHOTODENT.XRAY CO." at 149.708,116.256 h1.2
  text "433MHz" at 33.63,105.689 h2
Bottom Layer:
  rectangle net GND: 116.332,76.327 127.508,86.614
  region net AS: 45.453,114.63 45.504,114.579 51.829,114.579 48.781,117.627
  region net GND: 76.073,101.22 74.827,99.974 74.803,99.974 74.803,101.093 74.676,101.22
  region net MISO: 136.825,53.213 135.738,52.126 135.738,52.121 136.749,52.121 136.825,52.197
  region net GND: 140.97,38.608 140.903,38.541 137.16,38.541 137.16,35.814 137.871,35.103 142.824,35.103
  region net GND: 154.534,47.244 152.654,47.244 152.375,47.523 152.375,49.301 152.959,49.301 153.289,49.632
  region net GND: 142.646,57.226 144.551,59.131 144.551,57.25 144.445,57.144
  region net GND: 136.825,59.284 138.965,57.144 136.825,57.144
  region net GND: 127.197,63.421 125.247,63.881 125.247,63.221 126.047,62.42 127.197,62.42
  region net GND: 117.856,65.202 117.856,64.897 119.38,63.373 116.307,63.373
  region net GND: 124.841,64.44 124.739,64.44 123.8,63.5 124.968,63.5
  region net GND: 66.345,74.168 66.523,74.955 69.621,72.314 69.393,72.085 66.523,72.085
  region net GND: 40.259,70.129 42.316,68.072 42.045,67.801 40.259,67.801
  region net N: 52.299,48.793 56.007,48.793 55.877,48.664 55.877,45.212
  region net N: 52.908,47.269 52.908,42.621 53.086,42.443 55.27,44.628 55.27,45.364
  region net NetD6_K: 78.74,50.645 76.149,55.626 76.581,55.575 76.632,55.626 81.407,55.626 81.407,53.312
  region net GND: 74.346,50.775 76.251,48.87 72.669,48.87 72.39,48.59
  region net GND: 79.172,61.036 80.061,61.925 81.191,63.055 77.057,63.094 77.019,63.055
  region net GND: 49.581,70.434 47.193,68.047 47.193,67.869 49.838,67.869 49.906,67.801
  region net GND: 37.465,75.895 40.259,73.101 40.259,75.87 40.437,76.048
  region net N: 53.035,48.768 55.626,50.343 55.88,49.886 55.88,48.514 55.753,48.387
  region net GND: 72.644,65.176 70.688,63.221 74.835,63.221 75,63.055
  region net GND: 36.249,79.223 39.167,76.305 39.167,75.819 35.916,75.819
  region net VCC: 61.265,69.596 57.074,65.405 57.074,64.77 60.808,64.77
  region net GND: 153.518,47.498 152.248,46.228 152.248,47.396 152.375,47.523
  text "Serial & ISP" at 175.514,140.589 h1.2
  text "CONVERTER" at 172.974,138.557 h1
  text "SINCE 2016" at 164.084,121.793 h1
  text "EHP COMPANY" at 176.022,121.666 h1
  text "BT2.4 GHz" at 55.88,111.1 h2
  text "XRAY-DENTAL MACHINE" at 153.746,109.017 h2
  text "POWERED BY EHP PRODUCTS." at 153.441,106.35 h1.2
  text "V3.0" at 124.079,105.943 h2
  text "DESIGNED BY EHSAN SHAGHAEI" at 130.505,39.827 h1.5

## Silkscreen, mask and mechanical layers (free items; w line width, h text height)
Top Overlay:
  lines w0.254: 69.782,49.022 69.782,49.568 75.782,49.568 75.782,43.568 69.782,43.568 69.782,49.373 ; 153.166,120.904 153.166,143.784 177.058,143.784 177.058,121.011 ; 153.293,120.904 177.058,120.904 ; 26.67,32.893 177.165,32.893 177.165,120.142 26.67,120.142 26.67,32.893 ; 37.782,100.568 37.782,106.568 43.782,106.568 43.782,100.568 37.782,100.568 ; 42.782,43.568 42.782,49.568 48.782,49.568 48.782,43.568 42.782,43.568 ; 42.782,56.568 48.782,56.568 48.782,62.568 42.782,62.568 42.782,56.568 ; 54.282,93.632 54.282,99.632 60.282,99.632 60.282,93.632 54.282,93.632 ; 69.782,61.925 75.425,61.925 75.425,67.568 69.782,67.568 69.782,61.925 ; 74.282,86.568 126.282,86.568 126.282,106.568 74.282,106.568 74.282,86.568 ; 88.425,43.568 88.425,49.568 94.425,49.568 94.425,43.568 88.425,43.568 ; 88.425,61.568 88.425,67.568 94.425,67.568 94.425,61.568 88.425,61.568 ; 98.782,73.818 98.782,79.818 104.782,79.818 104.782,73.818 98.782,73.818 ; 107.425,43.568 107.425,49.568 113.425,49.568 113.425,43.568 107.425,43.568 ; 107.425,61.568 113.425,61.568 113.425,67.568 107.425,67.568 107.425,61.568 ; 128.77,43.568 128.77,49.568 134.77,49.568 134.77,43.568 128.77,43.568 ; 128.77,61.568 128.77,67.568 134.77,67.568 134.77,61.568 128.77,61.568 ; 139.855,93.62 139.855,99.62 146.282,99.62 146.282,93.62 139.855,93.62 ; 155.043,43.568 155.043,49.308 160.782,49.308 160.782,43.568 155.043,43.568 ; 155.043,56.829 155.043,62.568 160.782,62.568 160.782,56.829 155.043,56.829 ; 160.043,100.829 160.043,106.568 165.782,106.568 165.782,100.829 160.043,100.829
  text "EHP" at 156.972,130.81 h1
  text "2.4GHz" at 56.134,118.11 h2 r270
  text "433MHz" at 72.009,116.332 h2
  text "XRAY-DENTAL MACHINE" at 104.521,114.808 h3.6
  text "v 3.0" at 162.306,111.252 h2
  text "POWERED BY EHP PRODUCTS." at 104.648,111.125 h2
  text "PHOTODENT.XRAY" at 77.318,81.712 h3.5
  text "DESIGNED BY EHSAN SHAGHAEI" at 82.55,54.737 h2
Bottom Overlay:
  text "DANGER" at 85.725,35.687 h2
Mechanical 1:
  lines w0.254: 152.781,120.65 152.781,144.272 177.546,144.272 177.546,120.523 ; 177.546,120.523 26.289,120.523 26.289,32.41 177.546,32.41 177.546,120.523

## Text inside footprints (layer, text, board x,y; h text height)
B1: Bottom Overlay "+" at 158.701,82.634 h1.7
DS1: Top Overlay "1" at 90.297,88.9 h1.52; Top Overlay "12" at 89.789,103.378 h1.52
P3: Bottom Overlay "1" at 148.445,54.444 h1.2 r270; Bottom Overlay "2" at 148.445,56.744 h1.2 r270; Bottom Overlay "9" at 134.519,54.21 h1.2 r270; Bottom Overlay "10" at 134.419,56.31 h1.2 r270
P900: Top Overlay "1" at 173.21,126.912 h1.2 r270; Top Overlay "2" at 173.21,124.612 h1.2 r270; Top Overlay "9" at 159.284,127.146 h1.2 r270; Top Overlay "10" at 159.184,125.046 h1.2 r270
Q1: Bottom Overlay "3" at 76.327,57.226 h0.7 r90; Bottom Overlay "1" at 76.232,54.458 h0.7 r90